# EAGLE board CT_schematic (EAGLE 7.6.0)

Size 100 x 80 mm. Coordinates in mm from the lower left corner, seen from the top.
Outline: 0,0 100,0 100,80 0,80 0,0
Copper layers (1*16): Top 0.035mm / dielectric 1.5mm / Bottom 0.035mm
Design rules "default": minimum track width 10mil, minimum drill 24mil, track to track 8mil, track to pad 8mil, pad to pad 8mil, via to via 8mil, smd to smd 8mil, copper to edge 40mil, drill to drill 8mil, minimum pad ring 10mil, minimum via ring 8mil, stop-mask expansion 4mil, vias tented up to drill 0mil, thermal gap 10mil

## Footprints (pad centres in the part's own frame; a part is rotated, then mirrored left to right if it is on the bottom)
C0603 = smd 0.8 x 0.8: 1 -0.762,0; 2 0.762,0
C0402 = smd 0.5 x 0.5: 1 -0.508,0; 2 0.508,0
C0805 = smd 1.2 x 1.3: 1 -1.016,0; 2 1.016,0
C1210 = smd 1.2 x 2.5: 1 -1.524,0; 2 1.524,0
C1206 = smd 1.3 x 1.6: 1 -1.524,0; 2 1.524,0
L0603 = smd 0.8 x 0.8: 1 -0.762,0; 2 0.762,0
L1210 = smd 1.2 x 2.5: 1 -1.524,0; 2 1.524,0
R0603 = smd 0.8 x 0.8: 1 -0.762,0; 2 0.762,0
LQFP32 = smd 0.54 x 0.85: 1 -2.8,-4.275; 2 -2,-4.275; 3 -1.2,-4.275; 4 -0.4,-4.275; 5 0.4,-4.275; 6 1.19,-4.275; 7 1.99,-4.275; 8 2.79,-4.275; 17 2.8,4.275; 18 2,4.275; 19 1.2,4.275; 20 0.4,4.275; 21 -0.4,4.275; 22 -1.2,4.275; 23 -2,4.275; 24 -2.8,4.275 | smd 0.85 x 0.54: 9 4.275,-2.8; 10 4.275,-2; 11 4.275,-1.2; 12 4.275,-0.4; 13 4.275,0.4; 14 4.275,1.2; 15 4.275,2; 16 4.275,2.8; 25 -4.275,2.8; 26 -4.275,2; 27 -4.275,1.2; 28 -4.275,0.4; 29 -4.275,-0.4; 30 -4.275,-1.2; 31 -4.275,-2; 32 -4.275,-2.8
TST-110-05-T-D-RA = drill 1 pad 1.7 square: 1 0,0 | drill 1 pad 1.7: 2 0,2.54; 3 2.54,0; 4 2.54,2.54; 5 5.08,0; 6 5.08,2.54; 7 7.62,0; 8 7.62,2.54; 9 10.16,0; 10 10.16,2.54; 11 12.7,0; 12 12.7,2.54; 13 15.24,0; 14 15.24,2.54; 15 17.78,0; 16 17.78,2.54; 17 20.32,0; 18 20.32,2.54; 19 22.86,0; 20 22.86,2.54
SSOP-20 = smd 1.651 x 0.432: 1 -3.48,2.925; 2 -3.48,2.275; 3 -3.48,1.625; 4 -3.48,0.975; 5 -3.48,0.325; 6 -3.48,-0.325; 7 -3.48,-0.975; 8 -3.48,-1.625; 9 -3.48,-2.275; 10 -3.48,-2.925; 11 3.48,-2.925; 12 3.48,-2.275; 13 3.48,-1.625; 14 3.48,-0.975; 15 3.48,-0.325; 16 3.48,0.325; 17 3.48,0.975; 18 3.48,1.625; 19 3.48,2.275; 20 3.48,2.925
HTSS-105-01-G-D = drill 1 pad 1.8 square: 1 0,0 | drill 1 pad 1.8: 2 0,2.54; 3 2.54,0; 4 2.54,2.54; 5 5.08,0; 6 5.08,2.54; 7 7.62,0; 8 7.62,2.54; 9 10.16,0; 10 10.16,2.54
ASEK = smd 1.4 x 1: 1 -1.1,-0.8; 2 1.1,-0.8; 3 1.1,0.8; 4 -1.1,0.8
SOIC-8_EP = smd 1.6 x 0.533: 1 -2.921,1.905; 2 -2.921,0.635; 3 -2.921,-0.635; 4 -2.921,-1.905; 5 2.921,-1.905; 6 2.921,-0.635; 7 2.921,0.635; 8 2.921,1.905 | smd 2.54 x 3.302: EPAD 0,0 | drill 0.406 pad 0.406: P$1 -0.508,0.635; P$2 0.381,0.635; P$3 -0.508,-0.635; P$4 0.381,-0.635
DFN8_2X3MC = smd 0.813 x 0.305: 1 -1.398,0.75; 2 -1.398,0.25; 3 -1.398,-0.25; 4 -1.398,-0.75; 5 1.398,-0.75; 6 1.398,-0.25; 7 1.398,0.25; 8 1.398,0.75 | smd 1.753 x 1.549: 9 0,0
JST-2-SMD = smd 1 x 4.6: 1 -1,-3.7; 2 1,-3.7 | smd 1.6 x 3.4: NC1 -3.4,1.5; NC2 3.4,1.5
FCI_10118193-0001LF = smd 0.4 x 1.35: 1 -1.3,2.675; 2 -0.65,2.675; 3 0,2.675; 4 0.65,2.675; 5 1.3,2.675 | smd 1.6 x 1.4: 6 -3.2,2.45; 7 3.2,2.45 | smd 1.9 x 1.9: 8 -1.2,0; 9 1.2,0 | hole 0.5: -3.3,0; 3.3,0
SON-6 = smd 0.55 x 0.3: 1 -0.355,0.5 | smd 0.52 x 0.3: 2 -0.37,0; 3 -0.37,-0.5; 4 0.37,-0.5; 5 0.37,0; 6 0.37,0.5
SW_4-1437565-2 = smd 1.4 x 2.1: 1 -2.23,4.55; 2 -2.23,-4.55; 3 2.23,4.55; 4 2.23,-4.55
LGM67K-G1J2-24-Z = smd 0.8 x 1.4: A -2,0; C 0,0
NC7SZ125M5X = smd 1.3 x 0.7: 1 -1.3,0.95; 2 -1.3,0; 3 -1.3,-0.95; 4 1.3,-0.95; 5 1.3,0.95

## Placement (x,y rotation side)
C1  1e-07  [C0603]  -38.1,55.88 0 top  (outside the outline)
C2  1e-07  [C0603]  -41.91,55.88 0 top  (outside the outline)
C3  1e-07  [C0603]  -45.72,55.88 0 top  (outside the outline)
C4  1e-07  [C0603]  -49.53,55.88 0 top  (outside the outline)
C5  4.7e-06  [C0603]  -34.29,55.88 0 top  (outside the outline)
C6  1e-08  [C0603]  -53.34,55.88 0 top  (outside the outline)
C7  1e-06  [C0603]  -57.15,55.88 0 top  (outside the outline)
C8  1e-07  [C0402]  -49.53,60.96 0 top  (outside the outline)
C9  1e-06  [C0603]  -60.96,55.88 0 top  (outside the outline)
C10  1e-06  [C0603]  -15.24,60.96 0 top  (outside the outline)
C11  1e-06  [C0603]  -19.05,60.96 0 top  (outside the outline)
C12  4.7e-06  [C0805]  -15.24,50.8 0 top  (outside the outline)
C13  1e-08  [C0402]  -53.34,60.96 0 top  (outside the outline)
C14  1e-05  [C1210]  -57.15,35.56 0 top  (outside the outline)
C15  1e-05  [C1210]  -16.51,44.45 0 top  (outside the outline)
C16  1e-05  [C1210]  -22.86,44.45 0 top  (outside the outline)
C17  1e-05  [C1210]  -29.21,44.45 0 top  (outside the outline)
C18  1e-07  [C0402]  -57.15,60.96 0 top  (outside the outline)
C19  1e-05  [C1206]  -41.91,43.18 0 top  (outside the outline)
C20  1e-05  [C1206]  -48.26,43.18 0 top  (outside the outline)
C21  1e-08  [C0402]  -60.96,60.96 0 top  (outside the outline)
C22  1e-08  [C0402]  -15.24,66.04 0 top  (outside the outline)
F1  240.0  [L0603]  -22.86,60.96 0 top  (outside the outline)
I1  1.5e-05  [L1210]  -35.56,44.45 0 top  (outside the outline)
R1  10000.0  [R0603]  -54.61,49.53 0 top  (outside the outline)
R2  1000.0  [R0603]  -26.67,60.96 0 top  (outside the outline)
R3  1600.5  [R0603]  -30.48,60.96 0 top  (outside the outline)
R4  4700.0  [R0603]  -34.29,60.96 0 top  (outside the outline)
R5  10000.0  [R0603]  -59.69,49.53 0 top  (outside the outline)
R6  10000.0  [R0603]  -15.24,55.88 0 top  (outside the outline)
R7  100000.0  [R0603]  -29.21,49.53 0 top  (outside the outline)
R8  100000.0  [R0603]  -34.29,49.53 0 top  (outside the outline)
R9  100000.0  [R0603]  -39.37,49.53 0 top  (outside the outline)
R10  4031.5447154472  [R0603]  -24.13,49.53 0 top  (outside the outline)
R11  2200.0  [R0603]  -38.1,60.96 0 top  (outside the outline)
R12  10000.0  [R0603]  -20.32,55.88 0 top  (outside the outline)
R13  10000.0  [R0603]  -25.4,55.88 0 top  (outside the outline)
R14  9100.0  [R0603]  -41.91,60.96 0 top  (outside the outline)
R15  680000.0  [R0603]  -44.45,49.53 0 top  (outside the outline)
R16  120000.0  [R0603]  -49.53,49.53 0 top  (outside the outline)
R17  2000.0  [R0603]  -45.72,60.96 0 top  (outside the outline)
R18  10000.0  [R0603]  -30.48,55.88 0 top  (outside the outline)
U1  STM32L071KBT6  [LQFP32]  -24.13,7.62 0 top  (outside the outline)
U2  TST-110-05-T-D-RA  [TST-110-05-T-D-RA]  -46.99,26.67 0 top  (outside the outline)
U3  MAX3218EAP+T  [SSOP-20]  -36.83,19.05 0 top  (outside the outline)
U4  HTSS-105-01-G-D  [HTSS-105-01-G-D]  -27.94,19.05 0 top  (outside the outline)
U5  ASEK-32.768KHz-ECST  [ASEK]  -29.21,36.83 0 top  (outside the outline)
U6  MIC5234YME  [SOIC-8_EP]  -36.83,35.56 0 top  (outside the outline)
U7  MCP73831T-2ACI/MC  [DFN8_2X3MC]  -24.13,64.77 0 top  (outside the outline)
U8  S2B-PH-SM4-TB(LF)(SN)  [JST-2-SMD]  -58.42,6.35 0 top  (outside the outline)
U9  10118193-0001LF  [FCI_10118193-0001LF]  -46.99,17.78 0 top  (outside the outline)
U10  TPS3895ADRYR  [SON-6]  -17.78,64.77 0 top  (outside the outline)
U11  4-1437565-2  [SW_4-1437565-2]  -44.45,6.35 0 top  (outside the outline)
U12  Q65110A2395  [LGM67K-G1J2-24-Z]  -45.72,36.83 0 top  (outside the outline)
U13  nc7sz125m5x  [NC7SZ125M5X]  -53.34,43.18 0 top  (outside the outline)
U14  nc7sz125m5x  [NC7SZ125M5X]  -59.69,43.18 0 top  (outside the outline)

## Library data of the parts
C1-C22 F1 I1 R1-R18 U1-U14 = circuit_tree

## Nets
CLK_U1_2: U1.2 U5.3
GND: C1.2 C2.2 C3.2 C4.2 C5.2 C6.2 C7.2 C8.2 C9.2 C10.2 C11.2 C13.2 C14.2 C15.2 C16.2 C17.2 C18.2 C19.2 C20.2 C21.2 C22.2 R2.2 R5.2 R11.2 R14.2 R16.2 R17.2 U1.16 U1.32 U2.4 U2.6 U2.8 U2.10 U2.12 U2.14 U2.16 U2.18 U2.20 U3.5 U3.17 U3.20 U4.9 U5.2 U6.7 U6.EPAD U7.6 U7.9 U8.2 U9.5 U9.6 U9.7 U9.8 U9.9 U10.2 U12.C U13.2 U13.3 U14.1 U14.3
INPUT_USBPOWER_5V: C19.1 R18.2 U7.1 U7.2 U9.1
NET_U1_4: R4.1 U1.4 U14.4
NET_U1_5: C6.1 C7.1 F1.1 U1.5
NET_U1_29: R3.1 U1.29 U12.A
NET_U1_30: R1.1 U1.30 U11.3 U11.4
NET_U1_31: R5.1 U1.31
NET_U3_1: I1.1 U3.1
NET_U3_2: R7.1 U3.2
NET_U3_3: R8.1 U3.3
NET_U3_4: R9.1 U3.4
NET_U3_15: C11.1 U3.15
NET_U3_16: C12.2 U3.16
NET_U3_18: C12.1 U3.18
NET_U3_19: C10.1 U3.19
NET_U4_3: U3.12 U4.3
NET_U4_4: U3.11 U4.4
NET_U4_5: U3.14 U4.5
NET_U4_6: U3.13 U4.6
NET_U6_4: R10.2 R11.1 U6.4
NET_U7_5: R18.1 U7.5
NET_U7_8: R17.1 U7.8
NET_U10_1: R13.1 R14.1 U10.1
NET_U10_3: R15.2 R16.1 U10.3
NET_U10_4: R12.1 U10.4 U13.4 U14.2
NET_U11_1: R2.1 U11.1 U11.2
PROC_LPUART1_CTS: U1.12 U3.8
PROC_LPUART1_RTS: U1.15 U3.10
PROC_LPUART1_RX: U1.9 U3.9
PROC_LPUART1_TX: U1.8 U3.7
PROC_SYS_SWCLK: U1.24 U2.9
PROC_SYS_SWDIO: U1.23 U2.7
RST_OUT_U2_SRESET_B: R6.1 U2.15 U13.1
VCC_S1_3V7: C14.1 C15.1 C20.1 U6.5 U6.8 U7.3 U7.4 U8.1
VCC_TIER1_3V3: C1.1 C2.1 C3.1 C4.1 C5.1 C8.1 C9.1 C13.1 C16.1 C17.1 C18.1 C21.1 C22.1 F1.2 I1.2 R1.2 R3.2 R4.2 R6.2 R7.2 R8.2 R9.2 R10.1 R12.2 R13.2 R15.1 U1.1 U1.17 U2.1 U3.6 U5.4 U6.1 U10.6 U13.5 U14.5

## Tracks (layer width: path | path; a pad name or v marks a point on that pad's centre or on a via)
CLK_U1_2  (1 unrouted)
GND  (58 unrouted)
INPUT_USBPOWER_5V  (4 unrouted)
NET_U1_4  (2 unrouted)
NET_U1_5  (3 unrouted)
NET_U1_29  (2 unrouted)
NET_U1_30  (3 unrouted)
NET_U1_31  (1 unrouted)
NET_U3_1  (1 unrouted)
NET_U3_2  (1 unrouted)
NET_U3_3  (1 unrouted)
NET_U3_4  (1 unrouted)
NET_U3_15  (1 unrouted)
NET_U3_16  (1 unrouted)
NET_U3_18  (1 unrouted)
NET_U3_19  (1 unrouted)
NET_U4_3  (1 unrouted)
NET_U4_4  (1 unrouted)
NET_U4_5  (1 unrouted)
NET_U4_6  (1 unrouted)
NET_U6_4  (2 unrouted)
NET_U7_5  (1 unrouted)
NET_U7_8  (1 unrouted)
NET_U10_1  (2 unrouted)
NET_U10_3  (2 unrouted)
NET_U10_4  (3 unrouted)
NET_U11_1  (2 unrouted)
PROC_LPUART1_CTS  (1 unrouted)
PROC_LPUART1_RTS  (1 unrouted)
PROC_LPUART1_RX  (1 unrouted)
PROC_LPUART1_TX  (1 unrouted)
PROC_SYS_SWCLK  (1 unrouted)
PROC_SYS_SWDIO  (1 unrouted)
RST_OUT_U2_SRESET_B  (2 unrouted)
VCC_S1_3V7  (7 unrouted)
VCC_TIER1_3V3  (34 unrouted)